# Altium PCB 无线充电装置台.PcbDoc
Units mil, origin at the board's own origin, x right, y up, seen from the top; angles counter-clockwise.
Board outline 3185 x 3565 mil, 2 copper layers (Top Layer, Bottom Layer); 23 components, 47 nets, 156 pads, 37 vias.
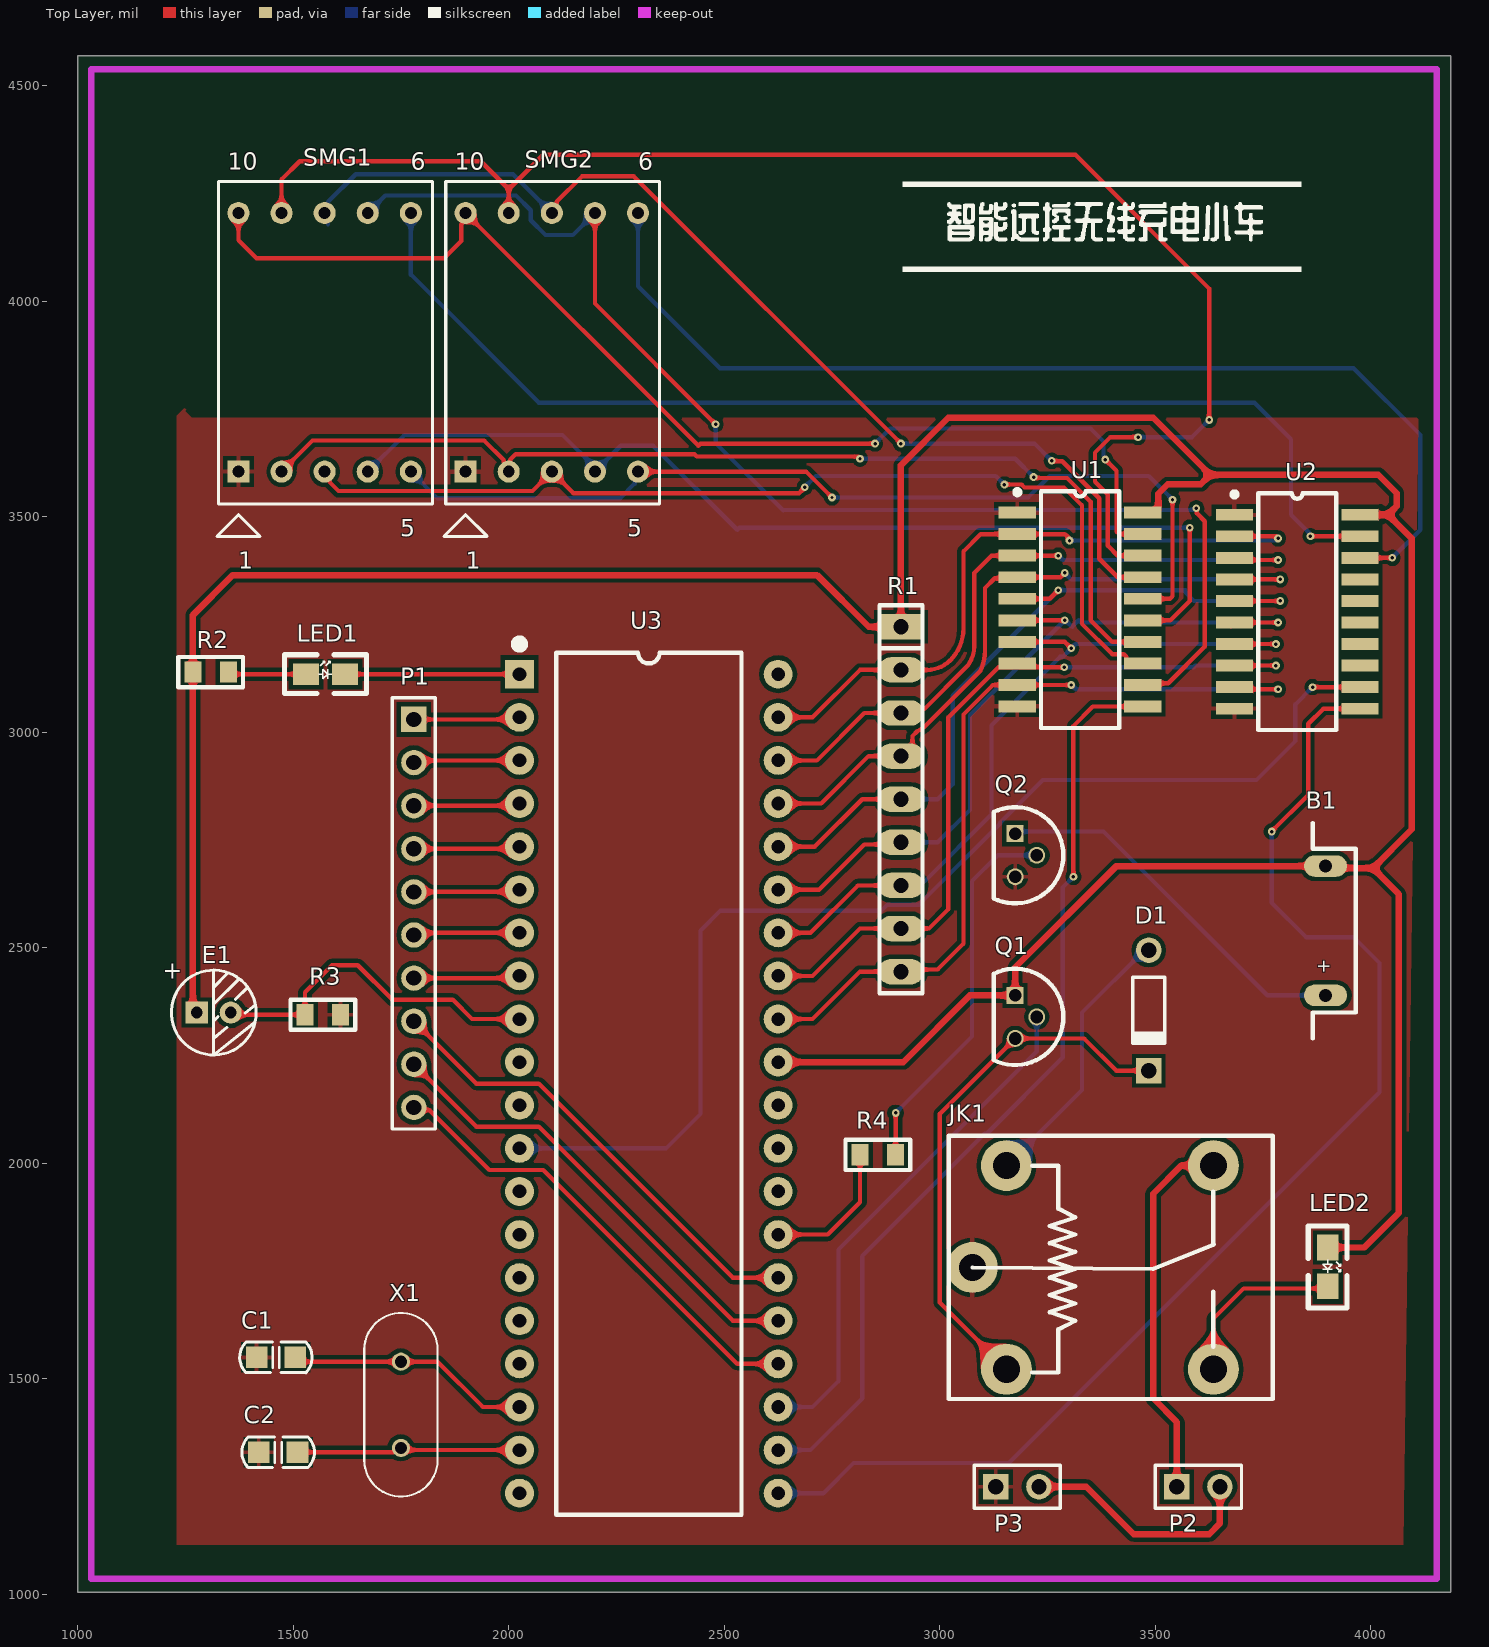
[diagram p0: Top Layer view]
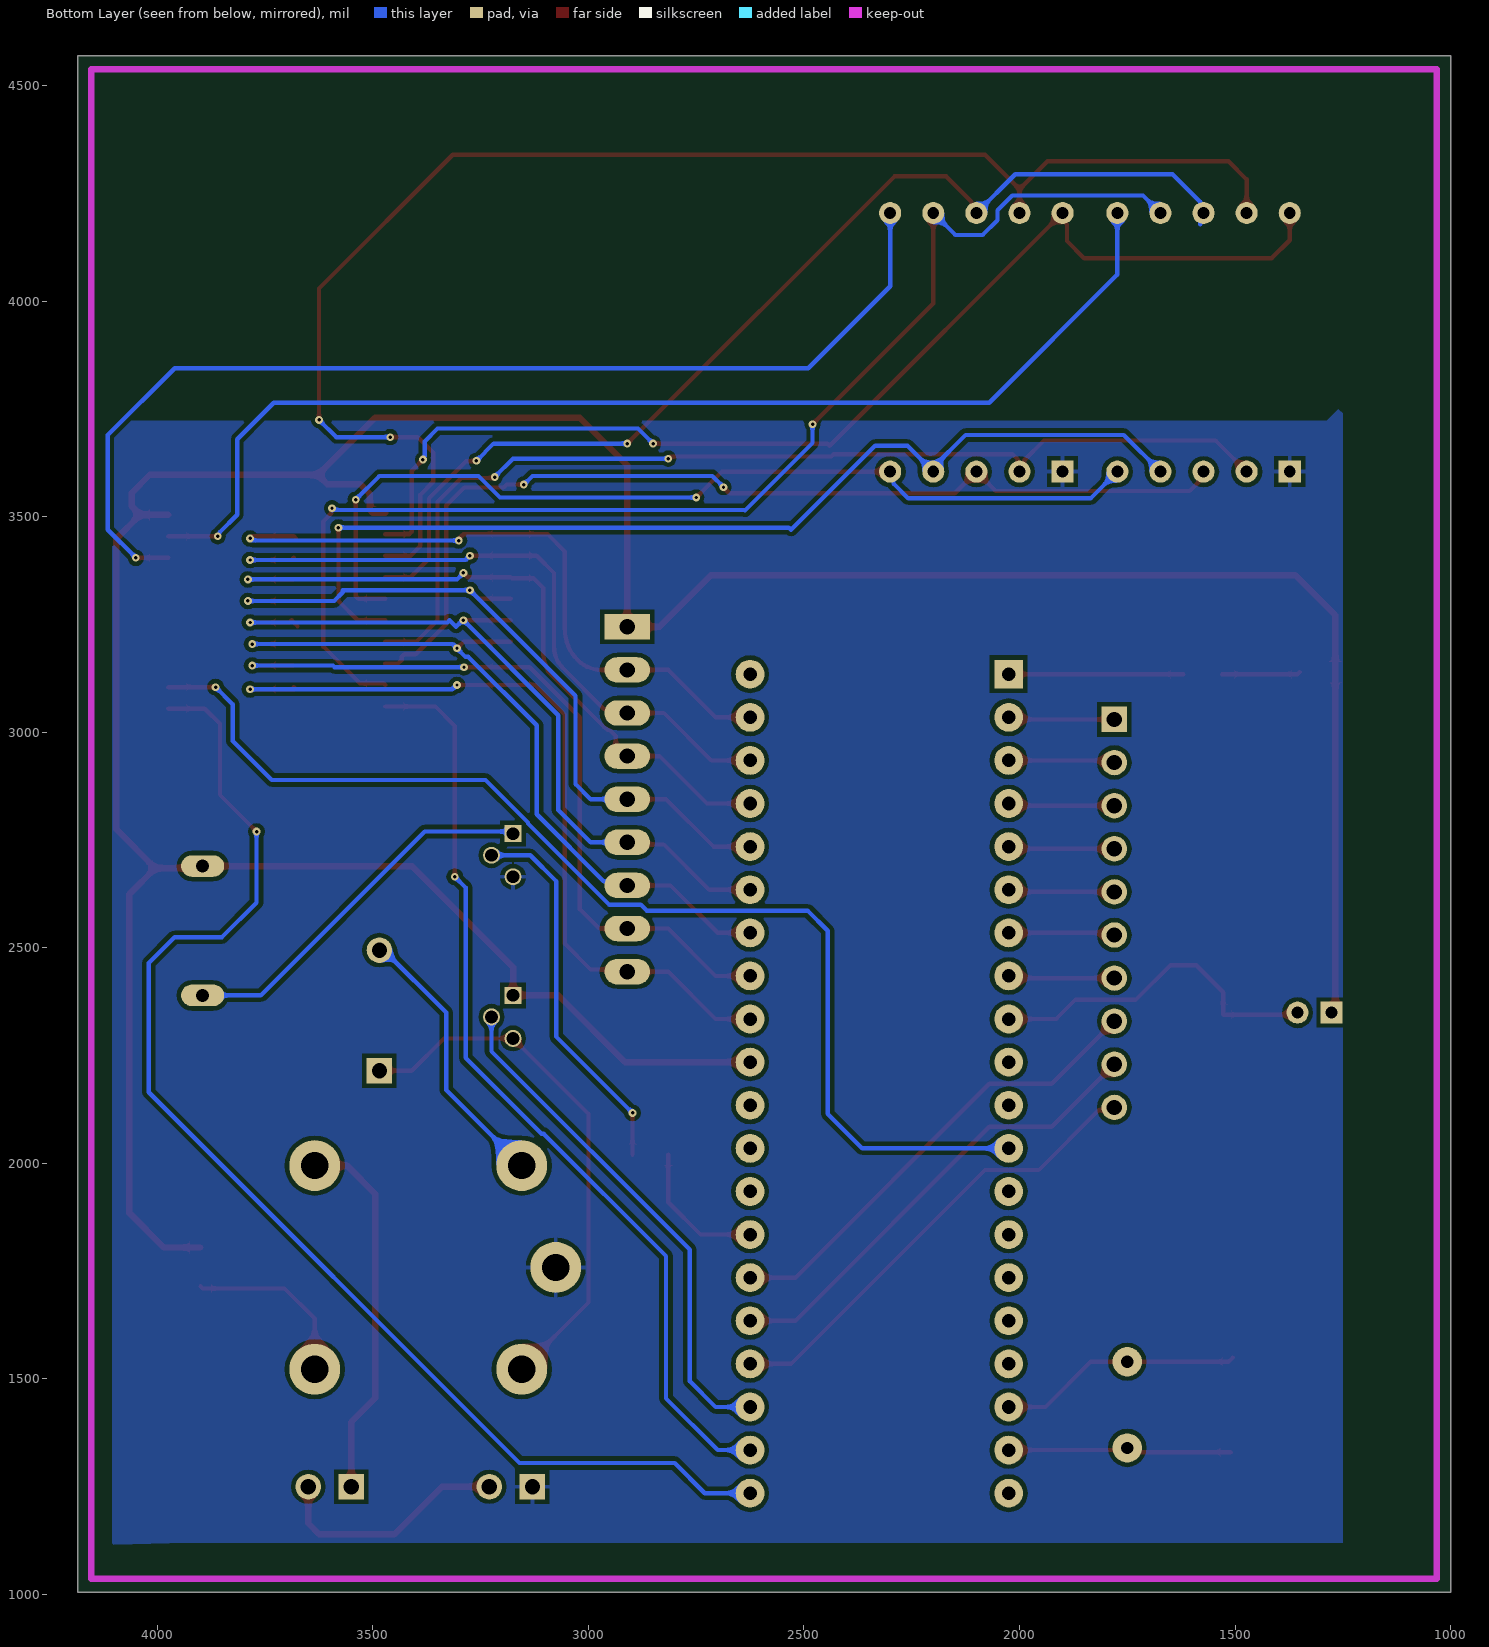
[diagram p1: Bottom Layer view, seen from below]

## Layer stack, top to bottom
Top Solder: solder mask 0.4, Solder Resist, Dk 3.5
Top Layer: signal copper 1.4
Dielectric 1: dielectric 12.6, FR-4, Dk 4.8
Bottom Layer: signal copper 1.4
Bottom Solder: solder mask 0.4, Solder Resist, Dk 3.5

## Board outline
1000,1005 4185,1005 4185,4570 1000,4570

## Design rules (kind name [scope] priority, off if disabled: settings)
Clearance [All] p1: gap=10 ignorepadtopadclearanceinfootprint=FALSE except(0: Arc-Hole Track-Hole SMDPad-Hole THPad-Hole Via-Hole Fill-Hole Poly-Hole Region-Hole Text-Hole)
PolygonConnect [All] p1: connectstyle=Relief reliefconductorwidth=10 reliefentries=4 polygonreliefangle="90 Angle" airgapwidth=10
RoutingVias [All] p1: holewidth=28 width=50 viastyle="Through Hole" minholewidth=28 minwidth=50 maxholewidth=28 maxwidth=50
SilkToSilkClearance [All] p1: silktosilkclearance=0
SilkToSolderMaskClearance [IsPad] p1: minsilkscreentomaskgap=0 clearancetoexposedcopper=TRUE
SolderMaskExpansion [All] p1: expansion=4 istentingtop=FALSE
Width Width_1 [InNetClass('POWER')] p1: maxlimit=20 minlimit=10 preferedwidth=15
Width [All] p2: maxlimit=10 minlimit=10 preferedwidth=10
28 further rules are at their usual default settings.

## Components (designator, comment, footprint, x,y, rotation, side; value= is the part's Value field where it differs from the comment)
B1 "Buzzer" 蜂鸣器侧装 3895,2590 r90 top
C1 "22pF" C0805 1460,1550 r0 top
C2 "22pF" C0805 1465,1330 r0 top
D1 "1N4148" DO-35 3485,2355 r270 top
E1 "10uF/16V" C-DIP2 1315.63,2350 r0 top
JK1 "SRD-S-112D" SRD-C_BK 3154.68,1995 r0 top
LED1 "红色" LED0805 1530,3135 r0 top
LED2 "H" LED0805 3900,1805 r270 top
P1 "Header 10" HDR1X10 1780,3030 r270 top
P2 "Header 2" HDR1X2 3550,1250 r0 top
P3 "Header 2" HDR1X2 3130,1250 r0 top
Q1 "S9012" TO92A 3175,2390 r270 top
Q2 "S9012" TO92A 3175,2765 r270 top
R1 "103" SIP-9 2910,3245 r270 top
R2 "0.1K" 0805 1308.66,3140 r0 top
R3 "10K" 0805 1568.66,2345 r0 top
R4 "10K" 0805 2856.34,2020 r0 top
SMG1 "3611A" DIP10-12.6X19 1373,3605 r0 top
SMG2 "3611A" DIP10-12.6X19 1900,3605 r0 top
U1 "74HC573" SOP20 3180,3510 r0 top
U2 "74HC573" SOP20 3683.66,3505 r0 top
U3 "STC89C51RC" DIP40-600 2325,2185 r0 top
X1 "11.0592MHz" XTAL-HC49US2 1750,1340 r90 top

## Footprints (in the part's own frame and the unit in brackets; to place one, negate y for a bottom-side part, rotate by r counter-clockwise, add the part's x,y. Pads: shape width x height; smd on the part's side, far side on the other; paste and mask are expansions set on the pad)
0805 [mm]
  rect 1x1.25 smd: 1(-1.05,0) 2(1.05,0)
  silkscreen extent -1.91,-0.89 1.91,0.89, body extent -1,-0.63 1,0.63, height 0.55
C0805 [mil]
  rect 50x50 smd: 1(-45,0) 2(45,0)
  silkscreen extent -84,-36 84,36, body extent -39,-25 40,24, height 20
C-DIP2 [mm]
  rect 1.3x1.3 hole 0.7: 1(-1,0)
  round 1.3 hole 0.7: 2(1,0)
  silkscreen extent -2.5,-2.5 2.5,2.5
DIP10-12.6X19 [mm] "DISPLAY"
  rect 1.3x1.3 hole 0.7: 1(0,0)
  round 1.3 hole 0.7: 2(2.54,0) 3(5.08,0) 4(7.62,0) 5(10.16,0) 6(10.16,15.24) 7(7.62,15.24) 8(5.08,15.24) 9(2.54,15.24) 10(0,15.24)
  silkscreen extent -1.27,-3.81 11.43,17.1
DIP40-600 [mm] "52*15.2*4mm(长宽高)"
  rect 1.7x1.7 hole 0.8: 1(-7.62,24.13)
  round 1.7 hole 0.8: 2(-7.62,21.59) 3(-7.62,19.05) 4(-7.62,16.51) 5(-7.62,13.97) 6(-7.62,11.43) 7(-7.62,8.89) 8(-7.62,6.35) 9(-7.62,3.81) 10(-7.62,1.27) 11(-7.62,-1.27) 12(-7.62,-3.81) 13(-7.62,-6.35) 14(-7.62,-8.89) 15(-7.62,-11.43) 16(-7.62,-13.97) 17(-7.62,-16.51) 18(-7.62,-19.05) 19(-7.62,-21.59) 20(-7.62,-24.13) 21(7.62,-24.13) 22(7.62,-21.59) 23(7.62,-19.05) 24(7.62,-16.51) 25(7.62,-13.97) 26(7.62,-11.43) 27(7.62,-8.89) 28(7.62,-6.35) 29(7.62,-3.81) 30(7.62,-1.27) 31(7.62,1.27) 32(7.62,3.81) 33(7.62,6.35) 34(7.62,8.89) 35(7.62,11.43) 36(7.62,13.97) 37(7.62,16.51) 38(7.62,19.05) 39(7.62,21.59) 40(7.62,24.13)
  silkscreen extent -7.87,-25.4 5.46,26.16, body extent -7.78,-26.18 7.78,26.18, height 4.7
DO-35 [mm] "Diode, Axial; Body 3.8 x 1.9 mm (LxDia. max), Lead Dia. 0.53 mm (max)"
  round 1.5 hole 0.9: 1(-3.55,0)
  rect 1.5x1.5 hole 0.9: 2(3.55,0)
  silkscreen extent -1.95,-0.95 2.05,0.95
HDR1X2 [mm] "Connector; Header; 2 Position"
  rect 1.5x1.5 hole 0.9: 1(0,0)
  round 1.5 hole 0.9: 2(2.54,0)
  silkscreen extent -1.27,-1.27 3.81,1.27
HDR1X10 [mm] "Connector; Header; 10 Position"
  rect 1.5x1.5 hole 0.9: 1(0,0)
  round 1.5 hole 0.9: 2(2.54,0) 3(5.08,0) 4(7.62,0) 5(10.16,0) 6(12.7,0) 7(15.24,0) 8(17.78,0) 9(20.32,0) 10(22.86,0)
  silkscreen extent -1.27,-1.27 24.13,1.27
LED0805 [mil]
  rect 60x50 smd: 1(0,0) 2(90,0)
  silkscreen extent -50,-45 140,45
SIP-9 [mm]
  rect 1.5x2.7 hole 0.9: 1(0,0)
  oval 1.5x2.7 hole 0.9: 2(2.54,0) 3(5.08,0) 4(7.62,0) 5(10.16,0) 6(12.7,0) 7(15.24,0) 8(17.78,0) 9(20.32,0)
  silkscreen extent -1.27,-1.27 21.59,1.27
SOP20 [mm]
  rect 2.2x0.7 smd: 1(0,0) 2(0,-1.27) 3(0,-2.54) 4(0,-3.81) 5(0,-5.08) 6(0,-6.35) 7(0,-7.62) 8(0,-8.89) 9(0,-10.16) 10(0,-11.43) 11(7.4,-11.43) 12(7.4,-10.16) 13(7.4,-8.89) 14(7.4,-7.62) 15(7.4,-6.35) 16(7.4,-5.08) 17(7.4,-3.81) 18(7.4,-2.54) 19(7.4,-1.27) 20(7.4,0)
  silkscreen extent -0.15,-12.69 6,1.35
SRD-C_BK [mm] "单刀双投"
  round 3 hole 1.6: 1(0,0) 2(0,-12) 3(-2,-6) 4(12.2,0) 5(12.2,-12)
  silkscreen extent -3.4,-13.75 15.7,1.75, body extent -3.33,-13.72 15.77,1.78, height 15.6
TO92A [mm]
  rect 1x1 hole 0.75: 1(0,0)
  round 1 hole 0.75: 2(1.27,1.27) 3(2.54,0)
  silkscreen extent -1.57,-1.27 4.11,2.84
XTAL-HC49US2 [mil]
  round 42 / inner round 68 / far side round 68 hole 28: 1(0,0) 2(200,0)
  silkscreen extent -113,-85 313,85
蜂鸣器侧装 [mil]
  oval 50x100 hole 30: 1(-200,0) 2(100,0)
  silkscreen extent -300,-70 200,30

## Part data
C1 C2: library part C, "无极性贴片电容", BOM名称=无极性贴片电容, 学习资源=www.ooocke.com, 版权归属=源创客
D1: "高速开关二极管", BOM名称=高速开关二极管, 学习资源=www.ooocke.com, 版权归属=源创客
E1: library part C-CAP, "直插电解电容", BOM名称=直插电解电容, 学习资源=www.ooocke.com, 版权归属=源创客
JK1: "12V一组转换", BOM名称=12V继电器, 学习资源=www.ooocke.com, 版权归属=源创客
LED1 LED2: library part LED-3MM, "插件LED", BOM名称=插件LED, 学习资源=www.ooocke.com, 版权归属=源创客
P1: "Header, 10-Pin", LatestRevisionDate=17-Jul-2002, LatestRevisionNote="Re-released for DXP Platform.", Publisher="Altium Limited"
P2 P3: "Header, 2-Pin", LatestRevisionDate=17-Jul-2002, LatestRevisionNote="Re-released for DXP Platform.", Publisher="Altium Limited"
Q1 Q2: library part 9012-DIP, "低频放大-PNP型", BOM名称=低频放大-PNP型, 学习资源=www.ooocke.com, 属性="50V 0.5A 0.625W", 版权归属=源创客
R1: library part "R SIP9", "单列直插排阻", BOM名称=单列直插排阻, 学习资源=www.ooocke.com, 版权归属=源创客
R2 R3 R4: library part R, "贴片电阻", BOM名称=贴片电阻, 学习资源=www.ooocke.com, 版权归属=源创客
SMG1 SMG2: "0.36寸1位共阴数码管", BOM名称=0.36寸1位共阴, 学习资源=www.ooocke.com, 版权归属=源创客
U1 U2: "D类三态输出锁存器", BOM名称=三态输出锁存器, 学习资源=www.ooocke.com, 版权归属=源创客
U3: "STC单片机", BOM名称=STC单片机, 学习资源=www.ooocke.com, 版权归属=源创客
X1: library part XTAL-2P, "2脚无源脚晶振", BOM名称=2脚无源脚晶振, 学习资源=www.ooocke.com, 版权归属=源创客

## Via types
v1: diameter 18, hole 8, Top Layer to Bottom Layer, 37 vias

## Nets (pads, with @x,y where several pads share a name; then routed paths per layer and width w, separated by ;. In a path a pad name is that pad's centre, name@x,y a point inside that pad or via, vN(x,y) a via of type N, cw(c..) or ccw(c..) an arc to the next point about the centre after c; other vN are vias at no path point)
a: SMG1.10 SMG2.10 U1.19 | length 2701.1
  Top Layer w10: SMG1.10 1373,4142 1415,4100 1850,4100 1890,4140 1890,4178.55 1892.12,4180.67 1892.12,4197.12 SMG2.10 2440,3665 2445,3670 v1(2850,3670) ; v1(3384,3632.84) 3410,3606.84 3410,3465.86 3415.86,3460 U1.19
  Bottom Layer w10: v1(2850,3670) 2885,3705 3350,3705 3380,3675 3380,3641.16 3384,3637.16 v1(3384,3632.84)
b: SMG1.9 SMG2.9 U1.18 | length 3411.7
  Top Layer w10: SMG1.9 1473,4283 1515,4325 1935,4325 2000,4260 ; SMG2.9 2000,4260 ; v1(3460,3685) 3395.86,3685 3360,3649.14 3360,3581.57 3390,3551.57 3390,3433.03 3413.03,3410 U1.18 ; v1(3625,3725) 3625,4030 3315,4340 2080,4340 2000,4260
  Bottom Layer w10: v1(3460,3685) 3585,3685 v1(3625,3725)
c: SMG1.8 SMG2.8 U1.17 | length 2524
  Top Layer w10: SMG2.8 2100,4216.14 2111.2,4227.35 2111.2,4231.2 2170,4290 2290,4290 v1(2910,3670) ; v1(3260,3630) 3260.72,3629.28 3284,3629.28 3370,3543.28 3370,3403.03 3413.03,3360 U1.17
  Bottom Layer w10: 1580.88,4179.12 1580.88,4197.12 SMG1.8 1580.88,4212.88 1580.88,4230.88 1645,4295 2010,4295 SMG2.8 ; v1(2910,3670) 3220,3670 v1(3260,3630)
CSDA: U2.12 U3.12 | length 2693.2
  Top Layer w10: v1(3865,3105) U2.12
  Bottom Layer w10: U3.12 2365,2035 2445,2115 2445,2540 2491.54,2586.54 2864.94,2586.54 2878.88,2600.47 2952.07,2600.47 3140.31,2788.72 3140.31,2790.9 3238.94,2889.53 3734.53,2889.53 3825,2980 3825,3065 v1(3865,3105)
d: SMG1.5 SMG2.5 U1.16 | length 2193.7
  Top Layer w10: SMG2.5 2690,3605 v1(2750,3545) ; U1.16 3534.14,3310 3540,3315.86 v1(3540,3540)
  Bottom Layer w10: SMG1.5 1835,3543 2258,3543 2292.12,3577.12 2292.12,3597.12 SMG2.5 ; v1(2750,3545) 3205,3545 3255,3595 3485,3595 v1(3540,3540)
D0: R1.2 U1.2 U2.2 U3.39 | length 1579.5
  Top Layer w10: U3.39 2705,3035 2815,3145 R1.2 2970.79,3145 2970.86,3145 ccw(c2970.86,3220.57) 3024.34,3167.17 ccw(c2950.28,3241.21) 3055,3241.21 3055,3420 3095,3460 U1.2 3290,3460 3297,3453 3297,3451.16 3301,3447.16 v1(3301,3445) ; U2.2@3678.66,3450 U2.2 3780,3455 v1(3785,3450)
  Bottom Layer w10: v1(3301,3445) 3780,3445 v1(3785,3450)
D1: R1.3 U1.3 U2.3 U3.38 | length 1578.4
  Top Layer w10: U3.38 2715,2935 2825,3045 R1.3 2919.39,3054.39 2964.39,3054.39 3059.36,3149.36 ccw(c3009.64,3199.14) 3080,3199.14 3080,3199.21 3080,3370 3120,3410 U1.3 v1(3275,3410) ; U2.3 3688.66,3400 v1(3785,3400)
  Bottom Layer w10: v1(3275,3410) 3285,3400 v1(3785,3400)
D2: R1.4 U1.4 U2.4 U3.37 | length 1615.5
  Top Layer w10: U3.37 2725,2835 2835,2945 R1.4 2914.07,2945 2936.73,2967.66 2936.73,2991.73 2947.78,3002.78 ccw(c2933.62,3045) 2965.08,3013.48 3093.34,3141.75 ccw(c3002.83,3189.14) 3094.1,3143.22 ccw(c3002.83,3189.14) 3105,3189.14 3105,3335 3127.55,3357.55 3177.55,3357.55 U1.4 3280,3360 v1(3290,3370) ; U2.4 v1(3790,3355)
  Bottom Layer w10: v1(3290,3370) 3305,3355 v1(3790,3355)
D3: R1.5 U1.5 U2.5 U3.36 | length 1754.4
  Top Layer w10: U3.36 2710,2735 2820,2845 R1.5 ; U1.5 3255,3310 v1(3275,3330) ; U2.5 v1(3790,3305)
  Bottom Layer w10: R1.5 2995,2845 3030,2880 3030,3085 v1(3275,3330) 3570,3330 3570,3325 3590,3305 v1(3790,3305)
D4: R1.6 U1.6 U2.6 U3.35 | length 1789.7
  Top Layer w10: U3.35 2720,2635 2825,2740 2905,2740 R1.6 ; U1.6 v1(3290,3260) ; U2.6@3675.19,3246.53 U2.6 3688.66,3260 3693.66,3255 v1(3785,3255)
  Bottom Layer w10: R1.6 2995,2745 3070,2820 3070,3040 v1(3290,3260) 3292.16,3260 3307.16,3245 3322.16,3260 3327.16,3255 v1(3785,3255)
D5: R1.7 U1.7 U2.7 U3.34 | length 1781
  Top Layer w10: U3.34 2700,2535 2810,2645 R1.7 ; U1.7 3290,3210 v1(3305,3195) ; U2.7 v1(3780,3205)
  Bottom Layer w10: R1.7 2919.39,2654.39 2964.39,2654.39 3120,2810 3120,3016.38 3278.84,3175.22 3285.22,3175.22 v1(3305,3195) 3315,3205 v1(3780,3205)
D6: R1.8 U1.8 U2.8 U3.33 | length 1810.2
  Top Layer w10: U3.33 2705,2435 2815,2545 R1.8 2975,2545 3020,2590 3020,3035 3136.22,3151.22 v1(3288.78,3151.22) ; U2.8 v1(3780,3155)
  Bottom Layer w10: v1(3288.78,3151.22) 3589.06,3151.22 3592.84,3155 v1(3780,3155)
D7: R1.9 U1.9 U2.9 U3.32 | length 1907.4
  Top Layer w10: U3.32 2705,2335 2815,2445 R1.9 2915,2450 2995,2450 3055,2510 3055,3041.72 3123.28,3110 U1.9 v1(3305,3110) ; U2.9 3680,3101.34 3681.34,3100 v1(3785,3100)
  Bottom Layer w10: v1(3305,3110) 3306.2,3110 3316.2,3100 v1(3785,3100)
DULA: U1.11 U3.22 | length 2190.6
  Top Layer w10: v1(3310,2665) 3310,3015 3355,3060 U1.11
  Bottom Layer w10: U3.22 2700,1335 2820,1455 2820,1785 3104.06,2069.06 3109.06,2069.06 3285,2245 3285,2640 v1(3310,2665)
e: SMG1.4 SMG2.4 U1.15 | length 2388.3
  Top Layer w10: U1.15 3535,3260 3580,3305 v1(3580,3475)
  Bottom Layer w10: SMG1.4 1758,3690 2125,3690 2200,3615 SMG2.4 2260,3665 2335,3665 2530,3470 2535,3475 v1(3580,3475)
f: SMG1.2 SMG2.2 U1.14 | length 2439.2
  Top Layer w10: SMG1.2 1545,3677 1943,3677 1988.8,3631.2 1988.8,3627.35 2000,3616.14 SMG2.2 2003.7,3608.7 2003.7,3632.84 2016.45,3645.59 2431.13,3645.59 2436.42,3640.3 2809.7,3640.3 v1(2815,3635) ; v1(3217.64,3592.36) 3220,3590 3295,3590 3350,3535 3350,3260 3400,3210 U1.14
  Bottom Layer w10: v1(2815,3635) 3175,3635 v1(3217.64,3592.36)
g: SMG1.3 SMG2.3 U1.13 | length 2326
  Top Layer w10: SMG1.3 1573,3593.86 1585.2,3581.65 1585.2,3579.8 1605,3560 2055,3560 SMG2.3 2150,3555 2673.28,3555 2686.64,3568.36 v1(2686.64,3569) ; v1(3150,3575) 3190,3575 3196.64,3568.36 3288.36,3568.36 3330,3526.72 3330,3251.72 3400.5,3181.22 3427.17,3181.22 3433.03,3175.36 3433.03,3168.78 3441.81,3160 U1.13
  Bottom Layer w10: v1(2686.64,3569) 2712.64,3595 3130,3595 v1(3150,3575)
GND: C1.1 C2.1 JK1.3 P3.1 Q2.3 R3.2 SMG1.1 SMG2.1 U1.1 U1.10 U2.1 U2.10
h: SMG1.7 SMG2.7 U1.12 | length 2956
  Top Layer w10: SMG2.7 2200,3995 v1(2480,3715) ; U1.12 3475.28,3113.94 3530,3113.94 3615,3198.94 3615,3490 3596.53,3508.47 3596.53,3518.47 v1(3595,3520)
  Bottom Layer w10: SMG1.7 1713.59,4245.59 2016.81,4245.59 2051.16,4211.24 2051.16,4188.15 2085.51,4153.8 2148.8,4153.8 SMG2.7 ; v1(2480,3715) 2480,3671.72 2636.72,3515 2637.72,3516 v1@3595,3516
NetB1_1: B1.1 Q2.1 | length 879.5
  Bottom Layer w10: Q2.1 3180,2770 3380,2770 3760,2390 B1.1
NetC1_2: C1.2 U3.18 X1.2 | length 567.6
  Top Layer w10: C1.2 1515,1540 X1.2 1835,1540 1940,1435 U3.18
NetC2_2: C2.2 U3.19 X1.1 | length 521.2
  Top Layer w10: C2.2 1731.34,1330 1741.34,1340 X1.1 1755,1335 U3.19
NetD1_1: D1.1 JK1.1 | length 642.6
  Bottom Layer w10: JK1.1 3330,2170.32 3330,2350 3474.76,2494.76 D1.1
NetD1_2: D1.2 JK1.2 Q1.3 | length 1245
  Top Layer w10: JK1.2 3000,1677.24 3000,2115 Q1.3 3335,2290 3409.76,2215.24 D1.2
NetE1_2: E1.2 R3.1 U3.9 | length 802.1
  Top Layer w10: E1.2 1360,2345 R3.1 1527.32,2397.32 1590,2460 1650,2460 1730,2380 1870,2380 1915,2335 U3.9
NetJK1_4: JK1.4 P2.1 | length 869.7
  Top Layer w15: P2.1 3550,1400 3495,1455 3495,1930 3560,1995 JK1.4
NetJK1_5: JK1.5 LED2.2 | length 413.5
  Top Layer w10: JK1.5 3635,1640 3705,1710 3895,1710 LED2.2
NetLED1_1: LED1.1 R2.2 | length 182.1
  Top Layer w10: R2.2 1355,3135 LED1.1
NetLED1_2: LED1.2 U3.1 | length 405
  Top Layer w10: LED1.2 U3.1
NetP2_2: P2.2 P3.2 | length 560.9
  Top Layer w15: P3.2 3340,1250 3450,1140 3625,1140 3650,1165 P2.2
NetQ2_2: Q2.2 R4.2 | length 883.3
  Top Layer w10: R4.2 v1(2897.68,2117.32)
  Bottom Layer w10: v1(2897.68,2117.32) 3075,2294.65 3075,2655 3135,2715 Q2.2
NetR4_1: R4.1 U3.27 | length 331.1
  Top Layer w10: U3.27 2740,1835 2815,1910 R4.1
P11: P1.1 U3.2 | length 247.1
  Top Layer w10: P1.1 2020,3030 U3.2
P12: P1.2 U3.3 | length 247.1
  Top Layer w10: P1.2 1785,2935 U3.3
P13: P1.3 U3.4 | length 247.1
  Top Layer w10: P1.3 2020,2830 U3.4
P14: P1.4 U3.5 | length 247.1
  Top Layer w10: P1.4 2020,2730 U3.5
P15: P1.5 U3.6 | length 247.1
  Top Layer w10: P1.5 2020,2630 U3.6
P16: P1.6 U3.7 | length 247.1
  Top Layer w10: P1.6 1785,2535 U3.7
P17: P1.7 U3.8 | length 247.1
  Top Layer w10: P1.7 2020,2430 U3.8
P23: P1.10 U3.24 | length 1091.5
  Top Layer w10: P1.10 1786.49,2123.51 1816.49,2123.51 1955,1985 2080,1985 2530,1535 U3.24
P24: P1.9 U3.25 | length 1091.5
  Top Layer w10: P1.9 1925,2085 2070,2085 2520,1635 U3.25
P25: P1.8 U3.26 | length 1091.5
  Top Layer w10: P1.8 1925,2185 2070,2185 2520,1735 U3.26
RELAY: Q1.2 U3.23 | length 1200.4
  Bottom Layer w10: U3.23 2705,1435 2765,1495 2765,1800 3225,2260 Q1.2
VCC: B1.2 E1.1 LED2.1 Q1.1 R1.1 R2.1 U1.20 U2.20 U3.31 | length 8149.3
  Top Layer w15: E1.1 1267.32,2358.94 R2.1 1267.32,3272.32 1360,3365 2715,3365 2835,3245 R1.1 2910,3620 3020,3730 3495,3730 3627.5,3597.5 ; U3.31 2915,2235 3070,2390 Q1.1 3175,2455 3410,2690 B1.2 3900,2685 4005,2685 ; U1.20 3500.87,3510 3507.14,3516.28 3507.14,3553.96 3528.91,3575.73 3605.73,3575.73 3627.5,3597.5 ; LED2.1 3985,1805 4065,1885 4065,2625 4005,2685 ; U2.20 4040,3505 ; 3627.5,3597.5 4017.5,3597.5 4060,3555 4060,3525 4040,3505 ; 4005,2685 4095,2775 4095,3450 4040,3505
WE1: SMG1.6 U2.19 | length 2701.9
  Top Layer w10: v1(3860,3455) U2.19
  Bottom Layer w10: SMG1.6 1773,4062 2070,3765 3730,3765 3815,3680 3815,3505 3856,3464 3856,3461.16 3860,3457.16 v1(3860,3455)
WE2: SMG2.6 U2.18 | length 2514.8
  Top Layer w10: U2.18 v1(4050,3405)
  Bottom Layer w10: SMG2.6 2300,4035 2490,3845 3960,3845 4115,3690 4115,3470 v1(4050,3405)
WELA: U2.11 U3.21 | length 2972.9
  Top Layer w10: v1(3770,2770) 3855,2855 3855,3020 3890,3055 U2.11
  Bottom Layer w10: U3.21 2730,1235 2800,1305 3160,1305 4020,2165 4020,2465 3960,2525 3850,2525 3770,2605 v1(3770,2770)
pads on no net: U2.13 U2.14 U2.15 U2.16 U2.17 U3.10 U3.11 U3.13 U3.14 U3.15 U3.16 U3.17 U3.20 U3.28 U3.29 U3.30 U3.40

## Polygon pours and split planes (outlines as drawn)
GND on Bottom Layer "GND_L02_P002" (solid, pour order 2): 1287.5,3722.5 4105,3722.5 4105,1115 3930,1120 3745,1120 1250,1120 1250,3740 1260,3750
GND on Top Layer "GND_L01_P003" (solid, pour order 3): 1250,3745 1265,3730 4110,3730 4075,1115 3750,1115 1230,1115 1230,3735 1255,3760

## Keep-outs
Keep-Out Layer:
  lines w15: 1031.5,1036.5 4153.5,1036.5 4153.5,4538.5 1031.5,4538.5 1031.5,1036.5

## Silkscreen, mask and mechanical layers (free items; w line width, h text height)
Top Overlay:
  drawing of 1221 lines, arcs and shapes, not listed
Mechanical 1:
  lines w20: 1000,1005 1000,4570 4175,4570 4185,4570 4185,4560 4185,1005 1000,1005

## Text inside footprints (layer, text, board x,y; h text height)
B1: Top Overlay "+" at 3905,2440 h30 r90
E1: Top Overlay "+" at 1197.52,2428.74 h40
SMG1: Top Overlay "1" at 1373,3380 h40; Top Overlay "5" at 1748,3455 h40; Top Overlay "6" at 1773,4305 h40; Top Overlay "10" at 1348,4305 h40
SMG2: Top Overlay "1" at 1900,3380 h40; Top Overlay "5" at 2275,3455 h40; Top Overlay "6" at 2300,4305 h40; Top Overlay "10" at 1875,4305 h40